# EAGLE board Seeeduino_Mega_v1.23 (EAGLE 5.10)
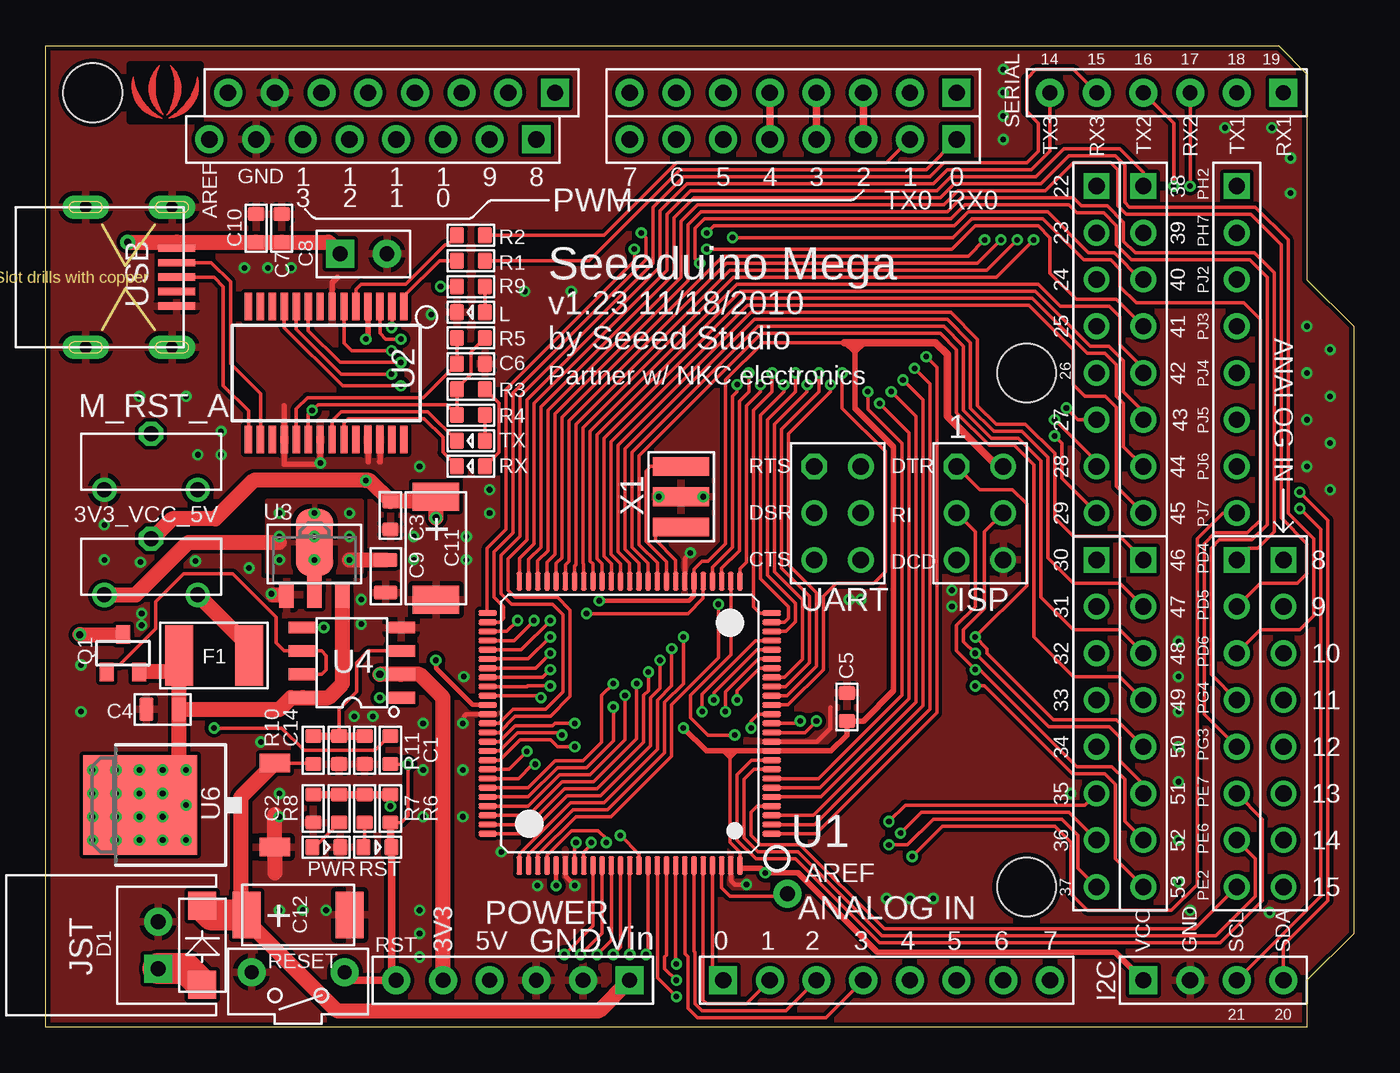
[diagram p0: board, top side]
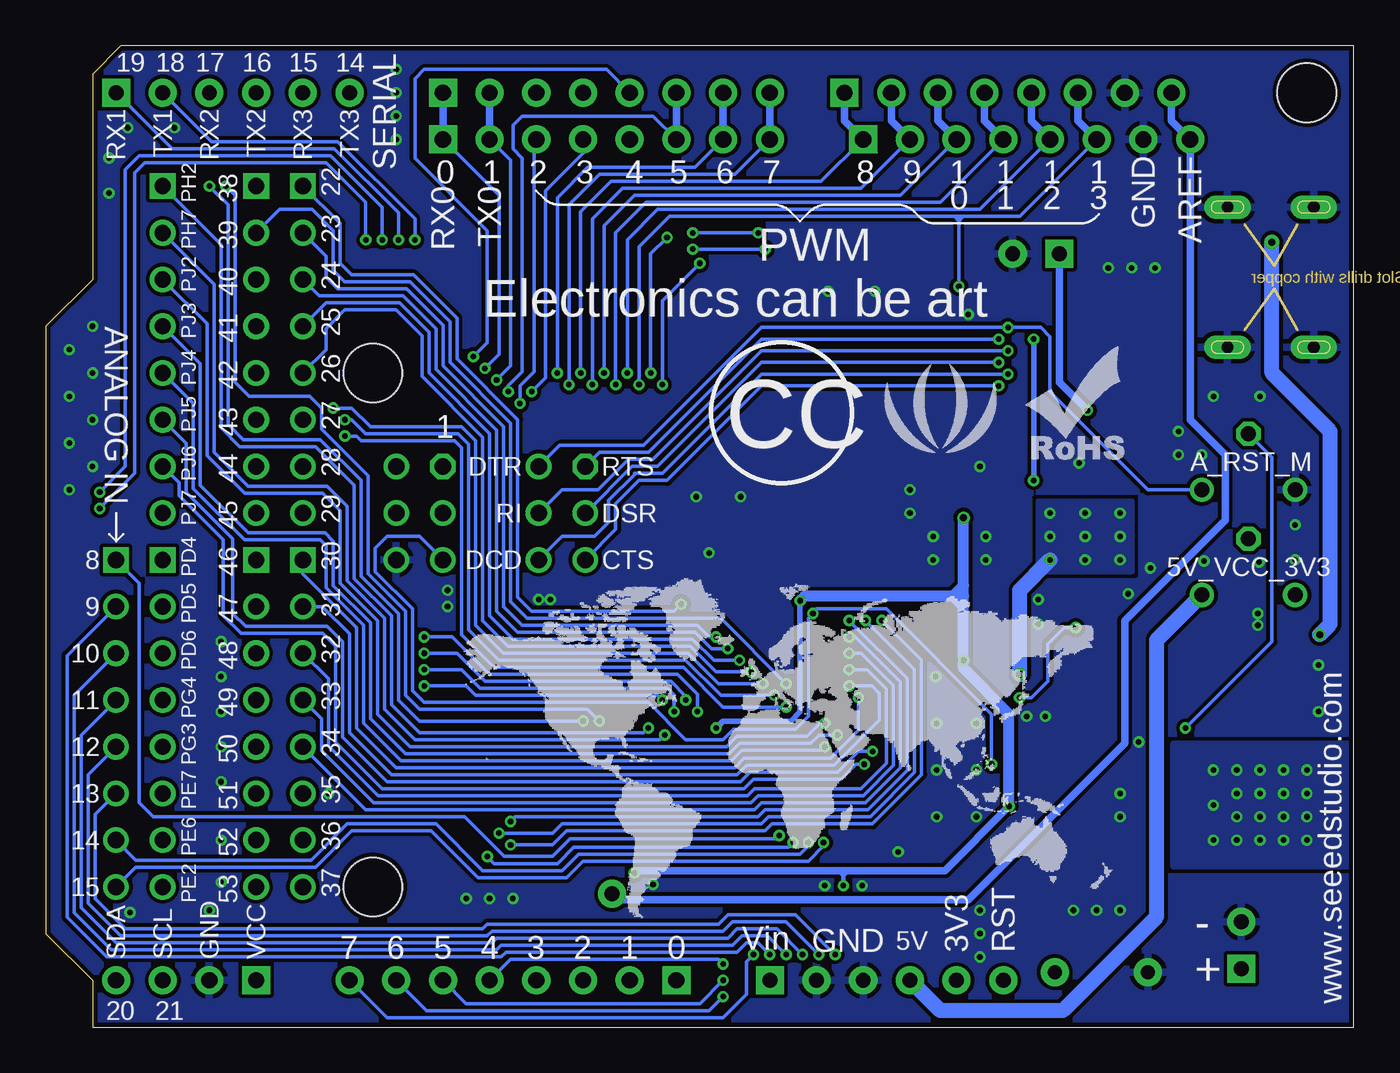
[diagram p1: board, bottom side, seen from below]

Size 71.12 x 53.34 mm. Coordinates in mm from the lower left corner, seen from the top.
Outline: 68.58,40.64 71.12,38.1 71.12,5.08 68.58,2.54 68.58,0 0,0 0,53.34 67.06,53.34 68.58,51.82 68.58,40.64
Copper layers (1*16): Top 0.035mm / dielectric 1.5mm / Bottom 0.035mm
Design rules "rule_manufacture *": minimum track width 8mil, minimum drill 12mil, track to track 6mil, track to pad 6mil, pad to pad 6mil, via to via 8mil, smd to smd 0mil, copper to edge 10mil, drill to drill 10mil, minimum pad ring 10mil, minimum via ring 6mil, stop-mask expansion 2mil, vias tented up to drill 25mil, thermal gap 10mil
Holes 3.2 mm at 2.54,50.8 53.34,7.62 53.34,35.56
tRestrict: area 22.5,30.6 to 23.4,32; area 4.6,49.3 to 8.4,52.3; area 17.5,31.5 to 18.2,32.3; area 15.2,38.9 to 15.9,39.9

## Footprints (pad centres in the part's own frame; a part is rotated, then mirrored left to right if it is on the bottom)
CK_1X8 = drill 0.889 pad 1.524 square: 1 0,8.89 | drill 0.889 pad 1.524 round: 2 0,6.35; 3 0,3.81; 4 0,1.27; 5 0,-1.27; 6 0,-3.81; 7 0,-6.35; 8 0,-8.89
2.54_JP_C = drill 0.813 round: A -1.27,2.54; B -1.27,-2.54 | drill 0.813 octagon: COM 1.778,0
0603_S = smd 0.762 x 0.889: 1 -0.762,0; 2 0.762,0
0805_S = smd 0.762 x 1.27: 1 -0.889,0; 2 0.889,0
PWR_1X2 = drill 0.813 pad 1.524 square: + 1.27,0 | drill 0.813 pad 1.524 round: - -1.27,0
TYPE_C = smd 1.524 x 2.54: + -2.794,0; - 2.794,0
DIODE_2010 = smd 1.524 x 1.524: + 0,-2.159; - 0,2.159
CK_1X8_THIN = drill 0.889 pad 1.397 square: 1 0,8.89 | drill 0.889 pad 1.397 round: 2 0,6.35; 3 0,3.81; 4 0,1.27; 5 0,-1.27; 6 0,-3.81; 7 0,-6.35; 8 0,-8.89
2512 = smd 1.524 x 3.302: 1 -1.905,0; 2 1.905,0
CK_1X4 = drill 0.889 pad 1.524 square: 1 0,3.81 | drill 0.889 pad 1.524 round: 2 0,1.27; 3 0,-1.27; 4 0,-3.81
CK_2X3_THIN = drill 0.889 pad 1.397 octagon: 1 -1.27,2.54 | drill 0.889 pad 1.397 round: 2 -1.27,0; 3 -1.27,-2.54; 4 1.27,-2.54; 5 1.27,0; 6 1.27,2.54
CK_1X6@1 = drill 0.813 pad 1.524 square: 1 0,6.35 | drill 0.813 pad 1.524 round: 2 0,3.81; 3 0,1.27; 4 0,-1.27; 5 0,-3.81; 6 0,-6.35
PWR_JST = drill 0.813 pad 1.524 square: + 0,-1.27 | drill 0.813 pad 1.524 round: - 0,1.27
LED0603_S = smd 0.762 x 0.889: 1 -0.762,0; 2 0.762,0
SOT23 = smd 0.762 x 1.016: 1 -0.889,-1.016; 2 0.889,-1.016; 3 0,1.016
BTN_5.0_RST = drill 0.762 pad 1.524 round: P$1 0,2.54; P$2 0,-2.54
TQFP100 = smd 1 x 0.3: 1 -7.725,6; 2 -7.725,5.5; 3 -7.725,5; 4 -7.725,4.5; 5 -7.725,4; 6 -7.725,3.5; 7 -7.725,3; 8 -7.725,2.5; 9 -7.725,2; 10 -7.725,1.5; 11 -7.725,1; 12 -7.725,0.5; 13 -7.725,0; 14 -7.725,-0.5; 15 -7.725,-1; 16 -7.725,-1.5; 17 -7.725,-2; 18 -7.725,-2.5; 19 -7.725,-3; 20 -7.725,-3.5; 21 -7.725,-4; 22 -7.725,-4.5; 23 -7.725,-5; 24 -7.725,-5.5; 25 -7.725,-6; 51 7.725,-6; 52 7.725,-5.5; 53 7.725,-5; 54 7.725,-4.5; 55 7.725,-4; 56 7.725,-3.5; 57 7.725,-3; 58 7.725,-2.5; 59 7.725,-2; 60 7.725,-1.5; 61 7.725,-1; 62 7.725,-0.5; 63 7.725,0; 64 7.725,0.5; 65 7.725,1; 66 7.725,1.5; 67 7.725,2; 68 7.725,2.5; 69 7.725,3; 70 7.725,3.5; 71 7.725,4; 72 7.725,4.5; 73 7.725,5; 74 7.725,5.5; 75 7.725,6 | smd 0.3 x 1: 26 -6,-7.725; 27 -5.5,-7.725; 28 -5,-7.725; 29 -4.5,-7.725; 30 -4,-7.725; 31 -3.5,-7.725; 32 -3,-7.725; 33 -2.5,-7.725; 34 -2,-7.725; 35 -1.5,-7.725; 36 -1,-7.725; 37 -0.5,-7.725; 38 0,-7.725; 39 0.5,-7.725; 40 1,-7.725; 41 1.5,-7.725; 42 2,-7.725; 43 2.5,-7.725; 44 3,-7.725; 45 3.5,-7.725; 46 4,-7.725; 47 4.5,-7.725; 48 5,-7.725; 49 5.5,-7.725; 50 6,-7.725; 76 6,7.725; 77 5.5,7.725; 78 5,7.725; 79 4.5,7.725; 80 4,7.725; 81 3.5,7.725; 82 3,7.725; 83 2.5,7.725; 84 2,7.725; 85 1.5,7.725; 86 1,7.725; 87 0.5,7.725; 88 0,7.725; 89 -0.5,7.725; 90 -1,7.725; 91 -1.5,7.725; 92 -2,7.725; 93 -2.5,7.725; 94 -3,7.725; 95 -3.5,7.725; 96 -4,7.725; 97 -4.5,7.725; 98 -5,7.725; 99 -5.5,7.725; 100 -6,7.725
SSOP28 = smd 0.4 x 1.5: 1 -4.225,-3.625; 2 -3.575,-3.625; 3 -2.925,-3.625; 4 -2.275,-3.625; 5 -1.625,-3.625; 6 -0.975,-3.625; 7 -0.325,-3.625; 8 0.325,-3.625; 9 0.975,-3.625; 10 1.625,-3.625; 11 2.275,-3.625; 12 2.925,-3.625; 13 3.575,-3.625; 14 4.225,-3.625; 15 4.225,3.625; 16 3.575,3.625; 17 2.925,3.625; 18 2.275,3.625; 19 1.625,3.625; 20 0.975,3.625; 21 0.325,3.625; 22 -0.325,3.625; 23 -0.975,3.625; 24 -1.625,3.625; 25 -2.275,3.625; 26 -2.925,3.625; 27 -3.575,3.625; 28 -4.225,3.625
SOT89 = smd 0.8 x 1.4: 1 -1.524,-1.905; 3 1.524,-1.905 | smd 0.8 x 1.9: 2 0,-1.651 | smd 2.032 x 3.65: 4 0,0.94
SOP08 = smd 0.635 x 1.524: 1 -1.905,-2.667; 2 -0.635,-2.667; 3 0.635,-2.667; 4 1.905,-2.667; 5 1.905,2.667; 6 0.635,2.667; 7 -0.635,2.667; 8 -1.905,2.667
TO252 = smd 1.016 x 1.651: 1 -2.286,-4.826; 2 2.286,-4.826 | smd 5.4 x 6.2: 3 0,2.5
MINI_STRONG = smd 2.032 x 0.406: 1 0.381,-1.575; 2 0.381,-0.787; 3 0.381,0; 4 0.381,0.787; 5 0.381,1.575 | drill 0.635 pad 1.27 long: GND@1 0.635,3.81; GND@2 5.334,3.81; GND@3 5.334,-3.81; GND@4 0.635,-3.81
XTAL_4X3 = smd 1.016 x 3.048: 1 -1.651,0; 2 0,0; 3 1.651,0

## Placement (x,y rotation side)
0~1  CK_1X8DD  [CK_1X8]  40.64,48.26 270 top
0~2  CK_1X8DD  [CK_1X8]  45.72,2.54 90 top
0~7  CK_1X8DD  [CK_1X8]  40.64,50.8 270 top
3V3_VCC_5V  2.54_JPC  [2.54_JP_C]  5.71,24.77 90 top
8~1  CK_1X8DD  [CK_1X8]  17.78,48.26 270 top
8~13  CK_1X8DD  [CK_1X8]  18.8,50.8 270 top
C1  100n  [0603_S]  18.73,15.05 90 top
C2  100n  [0603_S]  14.54,11.87 90 top
C3  100n  [0603_S]  18.73,27.81 90 top
C4  10u  [0805_S]  6.35,17.27 180 top
C5  100n  [0603_S]  43.56,17.4 270 top
C6  100n  [0603_S]  23.11,36.07 180 top
C7  100n  [0603_S]  12.83,43.43 90 top
C8  PWR2P_2.54_180  [PWR_1X2]  17.27,42.04 180 top
C9  10u  [0805_S]  18.48,24.51 270 top
C10  10n  [0603_S]  11.43,43.43 270 top
C11  47uF  [TYPE_C]  21.21,26.04 270 top
C12  47uF  [TYPE_C]  13.72,6.1 0 top
C14  100n  [0603_S]  15.94,15.05 90 top
D1  1N4001  [DIODE_2010]  8.51,4.45 0 top
D22~  CK_1X8_THIN  [CK_1X8_THIN]  57.15,36.83 0 top
D30~  CK_1X8_THIN  [CK_1X8_THIN]  57.15,16.51 0 top
D38~  CK_1X8_THIN  [CK_1X8_THIN]  59.69,36.83 0 top
D46~  CK_1X8_THIN  [CK_1X8_THIN]  59.69,16.51 0 top
F1  FUSE_500MA2512  [2512]  9.14,20.19 0 top
I2C  CK_1X4  [CK_1X4]  63.5,2.54 90 top
ISP  CK_2X3  [CK_2X3_THIN]  50.8,27.94 0 top
J8  CK_1X8_THIN  [CK_1X8_THIN]  64.77,16.51 0 top
J9  CK_1X8_THIN  [CK_1X8_THIN]  67.31,16.51 0 top
J10  CK_1X8_THIN  [CK_1X8_THIN]  64.77,36.83 0 top
J11  [CK_1X6@1]  25.4,2.54 270 top
JST  PWR2P_2.54  [PWR_JST]  6.1,4.45 0 top
L  GREEN  [LED0603_S]  23.11,38.86 180 top
LOGO1  LOGO_SILK  [LOGO_SILK]  22.48,32.89 0 bottom
LOGO2  ROHSSILK  [ROHS_SILK]  15.75,33.27 0 bottom
LOGO3  LOGO_COPPER150X124  [LOGO_COPPER_150X124]  6.48,50.55 0 top
M_RST_A  2.54_JPC  [2.54_JP_C]  5.71,30.48 90 top
PWR  GREEN  [LED0603_S]  15.24,9.78 0 top
Q1  P-MOSFET_SOT23  [SOT23]  4.19,20.32 0 top
R1  1k  [0603_S]  23.11,41.66 0 top
R2  1k  [0603_S]  23.11,43.05 0 top
R3  1k  [0603_S]  23.11,34.67 180 top
R4  1k  [0603_S]  23.11,33.27 180 top
R5  10k  [0603_S]  23.11,37.47 180 top
R6  10k  [0603_S]  18.73,11.87 90 top
R7  1k  [0603_S]  17.34,11.87 270 top
R8  1k  [0603_S]  15.94,11.87 270 top
R9  1k  [0603_S]  23.11,40.26 0 top
R10  10k  [0603_S]  14.54,15.05 270 top
R11  10k  [0603_S]  17.34,15.05 90 top
RESET  BOTTON_1_DP  [BTN_5.0_RST]  13.72,2.98 270 top
RST  RED  [LED0603_S]  18.03,9.78 0 top
RX  LED0603  [LED0603_S]  23.11,30.48 180 top
SERIAL  [CK_1X6@1]  60.96,50.8 270 top
TX  LED0603  [LED0603_S]  23.11,31.88 180 top
U1  ATMEGA1280-16AU  [TQFP100]  31.75,16.51 180 top
U2  FT232RL  [SSOP28]  15.24,35.56 180 top
U3  LD1117SOT89  [SOT89]  14.61,25.4 0 top
U4  LM358_SOP08  [SOP08]  16.64,19.81 90 top
U6  1117-5  [TO252]  7.62,12.06 90 top
U$1  WORLD_MAP_IID  [WORLD_MAP_1000X500]  20.95,15.62 0 bottom
UART  CK_2X3  [CK_2X3_THIN]  43.05,27.94 0 top
USB  [MINI_STRONG]  7.49,40.77 180 top
X1  16MHz  [XTAL_4X3]  34.54,28.83 90 top

## Library data of the parts
0~1 0~2 0~7 8~1 8~13 C8 D22~ D30~ D38~ D46~ I2C ISP J8-J11 JST SERIAL UART = CONNECTER
3V3_VCC_5V M_RST_A = CPT_CJ
C1-C7 C9-C12 C14 D1 F1 L PWR Q1 R1-R11 RESET RST RX TX X1 = CPT_SMD
LOGO1-LOGO3 U$1 = logo
U1-U4 U6 = ICs_v54
USB = Connector

## Nets
ADC8: J9.1 U1.89
ADC9: J9.2 U1.88
ADC10: J9.3 U1.87
ADC11: J9.4 U1.86
ADC12: J9.5 U1.85
ADC13: J9.6 U1.84
ADC14: J9.7 U1.83
ADC15: J9.8 U1.82
AP: U4.1 U4.5
AREF: 8~1.8 8~13.8 U1.98
CTS: U2.11 UART.3
D+: U2.15 USB.3
D-: U2.16 USB.2
DCD: U2.10 UART.4
DSR: U2.9 UART.2
DTR: M_RST_A.B U2.2 UART.6
FT_RST: C6.2 R5.2 U2.19
FT_RX: R2.1 U2.5
FT_TX: R1.1 U2.1
GATE: Q1.1 U4.6 U4.7
GND: 8~1.7 8~13.7 C2.1 C3.1 C4.2 C5.1 C6.1 C7.2 C8.- C9.2 C10.1 C11.- C12.- C14.1 I2C.2 ISP.4 J11.2 J11.3 JST.- L.2 M_RST_A.A PWR.2 R11.1 RESET.P$2 U1.11 U1.32 U1.62 U1.81 U1.99 U2.7 U2.18 U2.21 U2.25 U2.26 U3.1 U4.4 U6.1 USB.5 USB.GND@1 USB.GND@2 USB.GND@3 USB.GND@4 X1.2
LED_RX: RX.2 U2.23
LED_TX: TX.2 U2.22
N$1: C14.2 R10.1 R11.2 U4.3
N$2: U1.34 X1.3
N$3: U1.33 X1.1
N$4: D1.+ JST.+
N$5: R7.2 RST.1
N$6: U2.17
N$8: PWR.1 R8.2
N$9: L.1 R9.2
N$18: C1.2 M_RST_A.COM
N$31: R3.1 RX.1
N$32: R4.1 TX.1
PA0/D22: D22~.1 U1.78
PA1/D23: D22~.2 U1.77
PA2/D24: D22~.3 U1.76
PA3/D25: D22~.4 U1.75
PA4/D26: D22~.5 U1.74
PA5/D27: D22~.6 U1.73
PA6/D28: D22~.7 U1.72
PA7/D29: D22~.8 U1.71
PB0/D53: D46~.8 U1.19
PB1/SCK/D52: D46~.7 ISP.2 U1.20
PB2/MOSI/D51: D46~.6 ISP.5 U1.21
PB3/MISO/D50: D46~.5 ISP.1 U1.22
PB4/D10: 8~1.3 8~13.3 U1.23
PB5/D11: 8~1.4 8~13.4 U1.24
PB6/D12: 8~1.5 8~13.5 U1.25
PB7/D13: 8~1.6 8~13.6 R9.1 U1.26
PC0/D37: D30~.8 U1.53
PC1/D36: D30~.7 U1.54
PC2/D35: D30~.6 U1.55
PC3/D34: D30~.5 U1.56
PC4/D33: D30~.4 U1.57
PC5/D32: D30~.3 U1.58
PC6/D31: D30~.2 U1.59
PC7/D30: D30~.1 U1.60
PD0/SCL: I2C.3 U1.43
PD1/SDA: I2C.4 U1.44
PD2/RX1: SERIAL.1 U1.45
PD3/TX1: SERIAL.2 U1.46
PD4: J8.1 U1.47
PD5: J8.2 U1.48
PD6: J8.3 U1.49
PD7/D38: D38~.1 U1.50
PE0/RX0/D0: 0~1.1 0~7.1 R1.2 U1.2
PE1/TX0/D1: 0~1.2 0~7.2 R2.2 U1.3
PE2: J8.8 U1.4
PE3/D5: 0~1.6 0~7.6 U1.5
PE4/D2: 0~1.3 0~7.3 U1.6
PE5/D3: 0~1.4 0~7.4 U1.7
PE6: J8.7 U1.8
PE7: J8.6 U1.9
PF0/D54: 0~2.1 U1.97
PF1/D55: 0~2.2 U1.96
PF2/D56: 0~2.3 U1.95
PF3/D57: 0~2.4 U1.94
PF4/D58: 0~2.5 U1.93
PF5/D59: 0~2.6 U1.92
PF6/D60: 0~2.7 U1.91
PF7/D61: 0~2.8 U1.90
PG0/D41: D38~.4 U1.51
PG1/D40: D38~.3 U1.52
PG2/D39: D38~.2 U1.70
PG3: J8.5 U1.28
PG4: J8.4 U1.29
PG5/D4: 0~1.5 0~7.5 U1.1
PH0/RXD2: SERIAL.3 U1.12
PH1/TXD2: SERIAL.4 U1.13
PH2: J10.1 U1.14
PH3/D6: 0~1.7 0~7.7 U1.15
PH4/D7: 0~1.8 0~7.8 U1.16
PH5/D8: 8~1.1 8~13.1 U1.17
PH6/D9: 8~1.2 8~13.2 U1.18
PH7: J10.2 U1.27
PJ0/RXD3: SERIAL.5 U1.63
PJ1/TXD3: SERIAL.6 U1.64
PJ2: J10.3 U1.65
PJ3: J10.4 U1.66
PJ4: J10.5 U1.67
PJ5: J10.6 U1.68
PJ6: J10.7 U1.69
PJ7: J10.8 U1.79
PL0/D49: D46~.4 U1.35
PL1/D48: D46~.3 U1.36
PL2/D47: D46~.2 U1.37
PL3/D46: D46~.1 U1.38
PL4/D45: D38~.8 U1.39
PL5/D44: D38~.7 U1.40
PL6/D43: D38~.6 U1.41
PL7/D42: D38~.5 U1.42
RESET_1280: C1.1 ISP.3 J11.6 R6.1 RESET.P$1 RST.2 U1.30
RI: U2.6 UART.5
RTS: U2.3 UART.1
VCC: 3V3_VCC_5V.COM C2.2 C3.2 C5.2 C11.+ I2C.1 ISP.6 R6.2 R7.1 R8.1 U1.10 U1.31 U1.61 U1.80 U1.100 U2.4
VDD3V3: 3V3_VCC_5V.A C9.1 J11.5 U3.2 U3.4 U4.2
VDD5: C4.1 F1.1 Q1.2 U3.3 U4.8 U6.3
VDD5_USB: C7.1 C8.+ C10.2 Q1.3 R3.2 R4.2 R5.1 U2.20 USB.1
VDD5V: 3V3_VCC_5V.B F1.2 J11.4
VDD_EXT: C12.+ D1.- J11.1 R10.2 U6.2

## Tracks (layer width: path | path; a pad name or v marks a point on that pad's centre or on a via)
ADC8  (via drill 0.3)
  Top 0.203: U1.89 32.25,9.41 v31.24,10.41
  Bottom 0.203: J9.1 66.04,24.13 66.04,12.19 65.28,11.43 48.36,11.43 46.2,9.27 43.56,9.27 42.61,10.22 31.43,10.22 v31.24,10.41
ADC9  (via drill 0.3)
  Top 0.203: v31.75,3.94 U1.88
  Bottom 0.203: v31.75,3.94 32.38,4.57 33.02,4.57 33.53,4.06 46.1,4.06 46.35,3.81 67.82,3.81 69.98,5.97 69.98,20.19 J9.2
ADC10  (via drill 0.3)
  Top 0.203: U1.87 31.25,4.33 v30.86,3.94
  Bottom 0.203: v30.86,3.94 31.88,4.95 33.27,4.95 33.78,4.45 46.35,4.45 46.61,4.19 67.56,4.19 69.6,6.22 69.6,18.03 J9.3
ADC11  (via drill 0.3)
  Top 0.203: U1.86 30.75,4.71 v29.97,3.94
  Bottom 0.203: v29.97,3.94 31.37,5.33 33.53,5.33 34.04,4.83 46.61,4.83 46.86,4.57 67.31,4.57 69.22,6.48 69.22,15.88 J9.4
ADC12  (via drill 0.3)
  Top 0.203: U1.85 30.25,5.1 v29.08,3.94
  Bottom 0.203: v29.08,3.94 30.86,5.71 33.78,5.71 34.29,5.21 46.86,5.21 47.12,4.95 67.06,4.95 68.83,6.73 68.83,13.72 J9.5
ADC13  (via drill 0.3)
  Top 0.203: U1.84 29.75,5.49 v28.19,3.94
  Bottom 0.203: v28.19,3.94 30.35,6.1 34.04,6.1 34.54,5.59 47.12,5.59 47.37,5.33 66.8,5.33 68.45,6.99 68.45,11.56 J9.6
ADC14  (via drill 0.3)
  Top 0.203: U1.83 29.25,9.5 29.65,9.91 v29.65,10.03
  Bottom 0.203: v29.65,10.03 29.65,9.84 30.1,9.4 42.16,9.4 43.05,8.51 47.37,8.51 49.91,11.05 54.74,11.05 56.71,9.08 66.23,9.08 J9.7
ADC15  (via drill 0.3)
  Top 0.203: U1.82 28.75,9.95 v28.83,10.03
  Bottom 0.203: v28.83,10.03 28.83,9.84 29.65,9.02 41.91,9.02 42.8,8.13 47.62,8.13 50.16,10.67 54.48,10.67 56.45,8.7 66.23,8.7 J9.8
AP  (via drill 0.3)
  Top 0.203: v18.16,17.91 U4.1 | U4.5 v15.11,21.72
  Bottom 0.203: v18.16,17.91 17.53,17.91 16.64,18.8 16.64,20.83 15.75,21.72 v15.11,21.72
AREF  (via drill 0.81 pad 1.52)
  Top 0.203: U1.98 36.75,7.57 37.21,7.11 40.2,7.11 v40.32,7.24
  Bottom 0.203: 8.89,48.13 8.95,48.2 8~1.8
  Bottom 0.406: 8~1.8 9.91,49.28 8~13.8 | v40.32,7.24 40.01,6.92 20.95,6.92 12.45,15.43 12.45,22.1 6.99,27.56 6.99,31.11 8.89,33.02 8.89,48.13
CTS  (via drill 0.3)
  Top 0.203: U2.11 12.96,38.03 16.13,34.86 v19.3,34.86
  Bottom 0.203: v19.3,34.86 32.19,34.86 37.34,29.72 38.86,29.72 40.13,28.45 40.13,27.05 UART.3
D+
  Top 0.203: USB.3 9.14,40.77 9.65,40.26 9.65,34.86 11.02,33.5 U2.15
D-
  Top 0.203: USB.2 8.99,41.55 10.03,40.51 10.03,36.07 11.66,34.44 U2.16
DCD  (via drill 0.3)
  Top 0.203: U2.10 13.62,37.95 16.07,35.5 v18.8,35.5
  Bottom 0.203: v18.8,35.5 32.19,35.5 37.59,30.1 39.12,30.1 39.12,30.04 40.51,28.64 40.51,27.43 41.27,26.67 43.05,26.67 UART.4
DSR  (via drill 0.3)
  Top 0.203: U2.9 14.27,37.87 16,36.13 v19.3,36.13
  Bottom 0.203: v19.3,36.13 32.19,36.13 37.85,30.48 39.24,30.48 UART.2
DTR  (via drill 0.3)
  Top 0.203: U2.2 18.82,38.06 v18.8,38.04
  Bottom 0.203: UART.6 43.18,31.62 38.61,31.62 32.19,38.04 v18.8,38.04 17.02,38.04 16.51,37.53 16.51,34.54 11.18,29.21 M_RST_A.B
FT_RST
  Top 0.203: R5.2 C6.2 20.51,34.23 14.22,34.23 13.62,33.62 U2.19
FT_RX
  Top 0.203: U2.5 16.86,40.11 17.14,40.39 19.56,40.39 21.72,42.55 21.84,42.55 R2.1
FT_TX
  Top 0.203: U2.1 19.46,39.72 21.4,41.66 R1.1
GATE
  Top 0.203: U4.7 14.99,19.18 15.24,19.43 15.24,20.19 14.99,20.45 U4.6 12.95,20.45 12.51,20.89 12.51,22.29 10.16,24.64 7.49,24.64 5.97,23.11 5.97,21.65 4,19.68 3.56,19.68 3.3,19.43 Q1.1
GND  (via drill 0.3)
  Top 0.254: U1.11 41.93,15.51 42.67,16.26 42.67,17.4 | U1.32 34.75,25.48 v35.05,25.78 | U1.99 37.25,7.96 37.47,7.75 v38.1,7.75 | U1.81 28.25,8.2 v28.77,7.68 | U1.62 22.85,17.01 22.73,16.89
  Top 0.305: U2.25 17.52,30.75 17.53,30.73 | U2.26 18.16,30.74 18.16,30.73 | 12.96,33.77 U2.18 12.96,30.62 | 12.96,30.62 12.95,30.61 | U2.21 v14.91,30.66 14.86,30.61 12.98,30.61 12.96,30.62 | U2.7 15.56,40.46 15.88,40.77
  Top 0.813: 12.38,23.5 13.02,23.5 | 12.45,8.38 U6.1 12.45,11.56
  other vias: 66.55,6.22 49.28,23.75 49.28,22.86 24.77,9.53 66.67,48.9 64.14,48.9 61.59,20.95 61.59,19.05 61.59,17.14 61.59,15.24 61.59,13.34 61.59,10.16 67.69,47.24 67.69,45.34 69.85,36.83 68.58,38.1 68.58,35.56 68.58,33.02 68.58,30.48 69.85,34.29 69.85,31.75 69.85,29.21 52.07,49.53 52.07,48.26 55.75,12.7 43.69,23.24 44.32,23.24 33.34,28.83 35.75,28.83 20.32,30.48 24.13,29.21 24.13,27.94 22.86,26.67 22.86,25.4 20,25.4 20,26.67 26.73,7.68 12.7,12.7 12.7,11.43 12.7,6.35 13.97,6.35 15.24,6.35 52.07,50.8 52.07,52.07 62.23,6.35 61.59,7.87 48.26,6.99 46.99,6.99 45.72,6.99 10.79,41.27 12.06,41.27 13.34,41.27 20.95,38.73 26.04,40.01 28.57,40.01 20.32,6.35 20.32,5.08 20.32,3.81 20.51,16.51 20.51,13.97 20.51,11.43 11.05,24.96 12.26,23.56 11.68,15.49 5.14,25.27 8.13,25.34 22.73,19.05 17.14,23.24 17.14,21.91 17.78,16.89 16.76,16.89 7.62,34.29 22.67,16.51 22.67,13.97 22.67,11.43 5.21,22.48 5.21,21.84 5.08,34.29 9.53,32.38 9.53,31.11 8.26,31.11 1.91,17.14 1.91,19.68 3.17,25.4 3.17,27.3
  pour Top: -6.35,52.07 -5.08,52.07 -5.08,50.8 -6.35,50.8
  pour Bottom (isolate 0.203, rank 6): 0,53.34 67.06,53.34 68.58,51.82 68.58,40.64 71.12,38.1 71.12,5.08 68.58,2.54 68.58,0 0,0
  pour Top (isolate 0.203, rank 6): 0,53.34 67.06,53.34 68.58,51.82 68.58,40.64 71.12,38.1 71.12,5.08 68.58,2.54 68.58,0 0,0
LED_RX
  Top 0.203: U2.23 16.21,32.85 16.45,33.08 20.57,33.08 21.59,32.07 21.59,31.24 RX.2
LED_TX
  Top 0.203: U2.22 15.56,32.96 16.07,33.47 20.77,33.47 TX.2
N$1
  Top 0.203: U4.3 17.53,20.45 16.89,19.81 16.89,18.22 15.94,17.27 C14.2
  Top 0.406: R10.1 C14.2 R11.2
N$2
  Top 0.203: U1.34 33.75,25.3 32.64,26.42 32.64,30.23 32.89,30.48 X1.3
N$3
  Top 0.203: U1.33 34.25,25.38 33.15,26.48 33.15,27.18 X1.1
N$4
  Top 0.813: D1.+ 8.32,2.48
  Top 1.676: JST.+ 7.62,3.17 8.32,2.48
N$5
  Top 0.203: R7.2 17.34,9.84 RST.1
N$8
  Top 0.203: R8.2 14.61,9.78 PWR.1
N$9
  Top 0.203: R9.2 L.1
N$18  (via drill 0.3)
  Top 0.203: v9.14,16.26 12.83,16.26 14.03,15.05 17.91,15.05 18.67,15.81 C1.2
  Bottom 0.203: v9.14,16.26 4.45,20.95 4.45,30.99 M_RST_A.COM
N$31
  Top 0.203: RX.1 24.64,31.24 24.64,33.91 R3.1
N$32
  Top 0.203: TX.1 R4.1
PA0/D22  (via drill 0.3)
  Top 0.203: U1.78 26.75,9.36 28.82,11.43 30.73,11.43 34.04,14.73 34.04,17.53 36.58,20.07 v36.58,22.99
  Bottom 0.203: v36.58,22.99 36.96,22.61 44.7,22.61 45.47,23.37 45.47,33.02 48.77,36.32 48.77,38.54 51.12,40.89 54.48,40.89 55.12,41.53 55.12,43.69 D22~.1
PA1/D23  (via drill 0.3)
  Top 0.203: U1.77 26.25,9.39 28.67,11.81 30.54,11.81 33.66,14.92 33.66,17.65 34.67,18.67 v34.67,21.21
  Bottom 0.203: v34.67,21.21 35.05,21.21 35.69,21.84 45.21,21.84 46.23,22.86 46.23,32.64 49.53,35.94 49.53,38.16 51.5,40.13 55.24,40.13 55.88,40.77 55.88,41.91 D22~.2
PA2/D24  (via drill 0.3)
  Top 0.203: U1.76 25.75,9.42 28.53,12.19 30.35,12.19 33.27,15.11 33.27,17.78 34.04,18.54 v34.04,20.57
  Bottom 0.203: v34.04,20.57 34.92,20.57 35.81,21.46 45.47,21.46 46.61,22.61 46.61,32.45 49.91,35.75 49.91,37.97 51.69,39.75 56.26,39.75 D22~.3
PA3/D25  (via drill 0.3)
  Top 0.203: U1.75 26.28,10.51 28.35,12.57 30.16,12.57 32.89,15.3 32.89,17.91 33.4,18.41 v33.4,19.94
  Bottom 0.203: v33.4,19.94 34.8,19.94 35.94,21.08 45.72,21.08 46.99,22.35 46.99,32.26 50.29,35.56 50.29,37.78 51.88,39.37 55.88,39.37 D22~.4
PA4/D26  (via drill 0.3)
  Top 0.203: U1.74 26.25,11.01 28.19,12.95 29.97,12.95 32.51,15.49 32.51,18.03 32.77,18.29 v32.77,19.3
  Bottom 0.203: v32.77,19.3 34.67,19.3 36.07,20.7 45.97,20.7 47.37,22.1 47.37,32.07 50.67,35.37 50.67,37.59 52.07,38.99 54.86,38.99 55.88,37.97 55.88,36.83 D22~.5
PA5/D27  (via drill 0.3)
  Top 0.203: U1.73 26.24,11.51 28.07,13.34 29.78,13.34 32.13,15.68 v32.13,18.67 | D22~.6 56.13,33.02 v55.5,33.66
  Bottom 0.203: v32.13,18.67 34.54,18.67 36.2,20.32 46.23,20.32 47.75,21.84 47.75,31.88 48.51,32.64 53.47,32.64 54.48,33.66 v55.5,33.66
PA6/D28  (via drill 0.3)
  Top 0.203: U1.72 26.23,12.01 27.94,13.72 29.59,13.72 31.5,15.62 v31.5,18.03 | v54.86,33.02 57.15,30.73 D22~.7
  Bottom 0.203: v31.5,18.03 34.42,18.03 36.32,19.94 46.48,19.94 48.13,21.59 48.13,31.69 48.7,32.26 53.72,32.26 54.48,33.02 v54.86,33.02
PA7/D29  (via drill 0.3)
  Top 0.203: U1.71 26.23,12.51 27.81,14.1 29.4,14.1 30.86,15.56 v30.86,17.4 | v54.86,32.13 55.24,31.75 55.24,29.84 D22~.8
  Bottom 0.203: v30.86,17.4 34.29,17.4 36.45,19.56 46.74,19.56 48.51,21.34 48.51,31.5 48.9,31.88 53.98,31.88 54.23,32.13 v54.86,32.13
PB0/D53  (via drill 0.3)
  Top 0.203: D46~.8 58.17,9.14 58.17,13.21 57.59,13.78 55.82,13.78 51.05,18.54 v50.55,18.54 | U1.19 38.81,19.51 37.59,18.29 v37.59,17.78
  Bottom 0.203: v37.59,17.78 37.85,18.03 47.75,18.03 48.26,18.54 v50.55,18.54
PB1/SCK/D52  (via drill 0.3)
  Top 0.203: D46~.7 58.67,11.18 58.67,13.46 57.98,14.16 56.07,14.16 50.8,19.43 v50.55,19.43 49.53,20.45 49.53,21.84 50.55,22.86 50.55,26.92 ISP.2 | U1.20 38.74,20.01 36.96,18.23 v36.96,17.14
  Bottom 0.203: v36.96,17.14 36.96,18.06 37.32,18.41 47.5,18.41 48.51,19.43 v50.55,19.43
PB2/MOSI/D51  (via drill 0.3)
  Top 0.203: 59.69,13.08 D46~.6 59.69,13.21 58.42,14.48 58.42,15.75 57.85,16.32 54.55,16.32 v50.55,20.32 49.91,20.95 49.91,21.59 51.05,22.73 51.05,26.92 ISP.5 | U1.21 38.67,20.51 36.32,18.16 v36.32,17.78
  Bottom 0.203: v36.32,17.78 36.32,17.98 37.13,18.8 47.24,18.8 48.77,20.32 v50.55,20.32
PB3/MISO/D50  (via drill 0.3)
  Top 0.203: D46~.5 58.23,16.7 54.8,16.7 51.18,20.32 51.18,20.57 v50.55,21.21 53.34,24 53.34,28.45 52.58,29.21 50.8,29.21 ISP.1 | U1.22 38.6,21.01 35.69,18.1 v35.69,17.14
  Bottom 0.203: v35.69,17.14 35.69,18.1 36.77,19.18 46.99,19.18 49.02,21.21 v50.55,21.21
PB4/D10  (via drill 0.3)
  Top 0.203: v40.77,35.56 40.77,34.54 39.24,33.02 39.24,24.57 40.77,23.05 40.77,22.04 40.24,21.51 U1.23
  Bottom 0.203: 8~1.3 24.64,45.21 39.12,45.21 40.77,43.56 v40.77,35.56
  Bottom 0.406: 8~13.3 22.61,49.28 8~1.3
PB5/D11  (via drill 0.3)
  Top 0.203: v40.13,34.92 40.13,34.54 38.86,33.27 38.86,24.38 40.39,22.86 40.39,22.23 40.17,22.01 U1.24
  Bottom 0.203: 8~1.4 22.48,44.83 38.48,44.83 40.13,43.18 v40.13,34.92
  Bottom 0.406: 8~13.4 20.07,49.28 8~1.4
PB6/D12  (via drill 0.3)
  Top 0.203: U1.25 38.83,22.51 38.48,22.86 38.48,33.53 39.5,34.54 v39.5,35.56
  Bottom 0.203: 8~1.5 20.32,44.45 37.85,44.45 39.5,42.8 v39.5,35.56
  Bottom 0.406: 8~13.5 17.53,49.28 8~1.5
PB7/D13  (via drill 0.3)
  Top 0.203: v38.86,34.92 38.86,34.54 38.1,33.78 38.1,25.27 37.75,24.92 U1.26 | R9.1 v21.46,40.26
  Bottom 0.203: 8~1.6 18.16,44.07 21.21,44.07 | v38.86,34.92 38.86,42.42 37.21,44.07 21.72,44.07 | v21.46,40.26 21.46,43.81 | 21.46,43.81 21.21,44.07 | 21.21,44.07 21.46,44.07 | 21.46,43.81 21.46,44.07 | 21.46,43.81 21.72,44.07 | 21.46,44.07 21.72,44.07
  Bottom 0.406: 8~13.6 14.99,49.28 8~1.6
PC0/D37  (via drill 0.3)
  Top 0.203: D30~.8 56.13,8.64 56.13,10.41 55.24,11.3 48.26,11.3 46.86,9.91 v45.85,9.91 | U1.53 25.07,21.51 v25.65,22.1
  Bottom 0.203: v45.85,9.91 43.56,9.91 42.8,10.67 32,10.67 31.62,11.05 26.16,11.05 23.5,13.72 23.5,19.94 v25.65,22.1
PC1/D36  (via drill 0.3)
  Top 0.203: D30~.7 55.63,11.68 47.62,11.68 v46.48,10.54 | U1.54 25.45,21.01 v26.54,22.1
  Bottom 0.203: v46.48,10.54 43.56,10.54 43.05,11.05 32.19,11.05 31.81,11.43 26.29,11.43 23.88,13.84 23.88,19.43 v26.54,22.1
PC2/D35  (via drill 0.3)
  Top 0.203: D30~.6 56.52,12.06 46.74,12.06 v45.85,11.18 | U1.55 25.84,20.51 v27.43,22.1
  Bottom 0.203: v45.85,11.18 45.59,11.43 32.38,11.43 32,11.81 26.42,11.81 24.26,13.97 24.26,18.92 v27.43,22.1
PC3/D34  (via drill 0.3)
  Top 0.203: U1.56 26.23,20.01 v27.43,21.21
  Bottom 0.203: D30~.5 53.72,11.81 32.58,11.81 32.19,12.19 26.54,12.19 24.64,14.1 24.64,18.73 27.11,21.21 v27.43,21.21
PC4/D33  (via drill 0.3)
  Top 0.203: U1.57 26.62,19.51 v27.43,20.32
  Bottom 0.203: D30~.4 56.13,16.76 56.13,15.03 53.29,12.19 32.77,12.19 32.38,12.57 26.67,12.57 25.02,14.22 25.02,18.56 25.97,19.51 25.99,19.51 26.8,20.32 v27.43,20.32
PC5/D32  (via drill 0.3)
  Top 0.203: U1.58 27.01,19.01 v27.43,19.43
  Bottom 0.203: D30~.3 55.75,18.92 55.75,15.27 53.06,12.57 32.96,12.57 32.58,12.95 26.8,12.95 25.4,14.35 25.4,18.35 26.48,19.43 v27.43,19.43
PC6/D31  (via drill 0.3)
  Top 0.203: U1.59 26.16,18.51 26.19,18.54 v27.43,18.54
  Bottom 0.203: D30~.2 56.09,22.86 54.61,21.38 54.61,16 52.32,13.72 33.53,13.72 33.02,14.22 28.26,14.22 25.78,16.7 25.78,18.13 26.19,18.54 v27.43,18.54
PC7/D30  (via drill 0.3)
  Top 0.203: U1.60 26.82,18.01 v26.92,17.91
  Bottom 0.203: D30~.1 57.15,24.64 54.23,21.72 54.23,16.26 52.07,14.1 33.66,14.1 33.15,14.61 28.45,14.61 26.92,16.13 v26.92,17.91
PD0/SCL  (via drill 0.3)
  Top 0.203: I2C.3 69.34,7.11 69.34,27.05 v68.2,28.19 | U1.43 29.25,25.17 29.21,25.21 29.21,32.58 37.4,40.77 51.69,40.77 v53.72,42.8
  Bottom 0.203: v68.2,28.19 66.29,30.1 66.29,46.45 65.75,46.99 55.88,46.99 53.72,44.83 v53.72,42.8
PD1/SDA  (via drill 0.3)
  Top 0.203: I2C.4 67.31,4.45 69.72,6.86 69.72,27.56 v68.2,29.08 | U1.44 28.75,25.07 28.83,25.15 28.83,32.77 37.21,41.15 51.18,41.15 v52.83,42.8
  Bottom 0.203: v68.2,29.08 66.8,30.48 66.8,46.61 66.04,47.37 55.63,47.37 52.83,44.58 v52.83,42.8
PD2/RX1  (via drill 0.3)
  Top 0.203: U1.45 28.25,25.14 28.45,25.34 28.45,32.96 37.02,41.53 50.67,41.53 v51.94,42.8
  Bottom 0.203: v51.94,42.8 51.94,44.26 55.44,47.75 64.26,47.75 SERIAL.1
PD3/TX1  (via drill 0.3)
  Top 0.203: U1.46 27.75,25.21 28.07,25.53 28.07,33.15 36.83,41.91 50.16,41.91 v51.05,42.8
  Bottom 0.203: v51.05,42.8 51.05,43.94 55.24,48.13 62.1,48.13 SERIAL.2
PD4
  Top 0.203: U1.47 27.25,25.28 27.69,25.72 27.69,33.34 34.92,40.58 34.92,43.62 35.62,44.32 49.02,44.32 49.78,45.09 55.88,45.09 56.33,44.64 57.72,44.64 58.61,43.75 58.61,42.74 59.24,42.1 65.72,42.1 66.8,41.02 66.8,26.92 65.91,26.04 65.41,26.04 J8.1
PD5
  Top 0.203: J8.2 66.04,24.13 68.07,24.13 68.58,24.64 68.58,26.29 67.18,27.69 67.18,42.55 65.53,44.2 58.75,44.2 58.29,44.65 58.29,46.61 57.91,46.99 55.88,46.99 54.36,45.47 49.59,45.47 48.83,44.7 35.43,44.7 34.54,43.81 34.54,40.77 27.3,33.53 27.3,25.91 26.75,25.35 U1.48
PD6
  Top 0.203: J8.3 66.04,21.59 68.2,21.59 68.96,22.35 68.96,26.54 67.56,27.94 67.56,42.8 65.79,44.58 58.93,44.58 58.67,44.83 58.67,46.86 58.17,47.37 55.63,47.37 54.1,45.85 49.4,45.85 48.64,45.09 35.24,45.09 34.16,44.01 34.16,40.96 26.92,33.72 26.92,26.1 26.25,25.42 U1.49
PD7/D38
  Top 0.203: D38~.1 59.69,46.48 58.42,47.75 55.37,47.75 53.85,46.23 49.21,46.23 48.45,45.47 35.05,45.47 33.78,44.2 33.78,41.15 26.54,33.91 26.54,26.29 25.75,25.5 U1.50
PE0/RX0/D0  (via drill 0.3)
  Top 0.203: U1.2 41.81,11.01 48.07,17.27 48.07,34.99 v47.24,35.81 | R1.2 29.53,41.66 34.48,46.61 47.88,46.61 0~1.1
  Bottom 0.203: 0~1.1 46.48,45.21 46.48,36.58 v47.24,35.81
  Bottom 0.406: 0~1.1 0~7.1
PE1/TX0/D1  (via drill 0.3)
  Top 0.203: U1.3 41.74,11.51 47.69,17.46 47.69,34.1 v46.61,35.18 | R2.2 30.35,43.05 34.29,46.99 45.72,46.99 0~1.2
  Bottom 0.203: 0~1.2 46.86,48.26 46.86,48.13 45.85,47.12 45.85,35.94 v46.61,35.18
  Bottom 0.406: 0~1.2 0~7.2
PE2
  Top 0.203: U1.4 38.68,12.01 38.35,11.68 38.35,10.41 38.86,9.91 41.02,9.91 45.59,5.33 62.48,5.33 J8.8
PE3/D5  (via drill 0.3)
  Top 0.203: U1.5 42.16,12.51 47.31,17.65 47.31,33.21 v45.97,34.54
  Bottom 0.203: 0~1.6 38.1,49.53 45.21,49.53 45.72,49.02 45.72,47.75 45.21,47.24 45.21,35.62 45.97,34.86 v45.97,34.54
  Bottom 0.406: 0~1.6 0~7.6
PE4/D2  (via drill 0.3)
  Top 0.203: U1.6 42.09,13.01 46.93,17.84 46.93,32.32 v45.34,33.91
  Top 0.406: 0~1.3 0~7.3
  Bottom 0.203: 0~1.3 44.58,48.13 44.58,35.62 45.34,34.86 v45.34,33.91
PE5/D3  (via drill 0.3)
  Top 0.203: U1.7 42.02,13.51 46.55,18.03 46.55,31.75 44.7,33.59 v44.7,34.54
  Top 0.406: 0~1.4 0~7.4
  Bottom 0.203: 0~1.4 41.91,47.5 43.94,45.47 43.94,35.31 v44.7,34.54
PE6
  Top 0.203: U1.8 38.52,14.01 37.97,13.46 37.97,10.29 38.73,9.53 40.89,9.53 45.47,4.95 63.63,4.95 65.79,7.11 65.79,9.14 J8.7
PE7
  Top 0.203: U1.9 38.39,14.51 37.59,13.72 37.59,10.16 38.61,9.14 40.77,9.14 45.34,4.57 63.88,4.57 66.17,6.86 66.17,11.3 J8.6
PF0/D54
  Top 0.203: U1.97 36.25,3.12 0~2.1
PF1/D55
  Top 0.203: U1.96 35.75,1.46 35.94,1.27 38.1,1.27 0~2.2
PF2/D56
  Top 0.203: 0~2.3 40.26,0.89 35.69,0.89 35.31,1.27 35.31,4.06 35.25,4.12 U1.95
PF3/D57
  Top 0.203: 0~2.4 42.42,0.51 35.43,0.51 34.92,1.02 34.92,3.81 34.75,3.98 U1.94
PF4/D58  (via drill 0.3)
  Top 0.203: U1.93 34.25,3.47 v34.29,3.43
  Bottom 0.203: 0~2.5 45.85,3.68 34.54,3.68 v34.29,3.43
PF5/D59  (via drill 0.3)
  Top 0.203: U1.92 33.75,3.9 33.66,3.81 33.66,3.17 v34.29,2.54
  Bottom 0.203: 0~2.6 48.26,1.27 35.56,1.27 v34.29,2.54
PF6/D60  (via drill 0.3)
  Top 0.203: U1.91 33.25,2.69 v34.29,1.65
  Bottom 0.203: 0~2.7 50.42,0.89 35.05,0.89 v34.29,1.65
PF7/D61  (via drill 0.3)
  Top 0.203: U1.90 32.75,4.05 v32.64,3.94
  Bottom 0.203: 0~2.8 52.58,0.51 34.29,0.51 33.02,1.78 33.02,3.56 v32.64,3.94
PG0/D41  (via drill 0.3)
  Top 0.203: D38~.4 58.23,39.56 56.04,39.56 54.61,40.99 54.61,42.93 53.98,43.56 50.55,43.56 49.28,42.29 v35.94,42.29 | U1.51 24.02,22.58 24,22.61 24,26.04 25.02,27.05 25.02,34.67 32,41.66 v32,42.29
  Bottom 0.203: v32,42.29 v35.94,42.29
PG1/D40  (via drill 0.3)
  Top 0.203: D38~.3 59.56,40.64 58.1,42.1 56.71,42.1 54.48,44.32 50.16,44.32 49.4,43.56 36.32,43.56 v35.94,43.18 | U1.52 24.68,22.01 24.89,22.23 24.89,22.86 24.38,23.37 24.38,25.84 25.4,26.86 25.4,34.48 32.64,41.72 32.64,42.93 v32.38,43.18
  Bottom 0.203: v32.38,43.18 v35.94,43.18
PG2/D39  (via drill 0.3)
  Top 0.203: U1.70 26.22,13.01 27.69,14.48 29.21,14.48 30.23,15.49 30.23,18.03 v30.86,18.67
  Bottom 0.203: D38~.2 58.42,44.45 56.64,44.45 55.5,43.31 55.5,41.15 54.86,40.51 51.31,40.51 49.15,38.35 49.15,36.13 45.85,32.83 45.85,23.11 44.96,22.23 34.42,22.23 v30.86,18.67
PG3  (via drill 0.3)
  Top 0.203: J8.5 62.99,17.02 62.99,26.29 63.56,26.86 65.34,26.86 66.04,27.56 66.04,38.48 65.15,39.37 59.31,39.37 58.42,40.26 58.42,41.21 57.91,41.72 56.45,41.72 54.23,43.94 50.35,43.94 49.34,42.93 v37.34,42.93 | v38.23,35.56 38.23,34.54 37.72,34.04 37.72,25.91 36.75,24.94 U1.28
  Bottom 0.203: v38.23,35.56 38.23,42.04 v37.34,42.93
PG4  (via drill 0.3)
  Top 0.203: J8.4 63.37,19.18 63.37,26.04 63.82,26.48 65.6,26.48 66.42,27.3 66.42,40.77 65.47,41.72 59.04,41.72 58.23,42.53 58.23,43.56 57.53,44.26 56.07,44.26 55.63,44.7 49.97,44.7 49.21,43.94 35.81,43.94 35.31,43.43 35.31,41.78 v35.56,41.53 | v37.59,34.92 37.59,34.54 37.34,34.29 37.34,26.1 36.25,25.01 U1.29
  Bottom 0.203: v37.59,34.92 37.59,39.5 v35.56,41.53
PG5/D4  (via drill 0.3)
  Top 0.203: U1.1 41.88,10.51 48.45,17.08 48.45,35.88 v47.88,36.45
  Top 0.406: 0~7.5 0~1.5
  Bottom 0.203: 0~7.5 40.64,52.07 50.55,52.07 51.05,51.56 51.05,47.24 47.12,43.31 47.12,37.21 v47.88,36.45
PH0/RXD2  (via drill 0.3)
  Top 0.203: U1.12 41.28,16.01 v41.91,16.64 | v62.23,45.72 SERIAL.3
  Bottom 0.203: v41.91,16.64 50.8,16.64 51.94,17.78 51.94,22.48 53.98,24.51 53.98,29.72 56.2,31.94 60.39,31.94 61.21,32.77 61.21,44.7 v62.23,45.72
PH1/TXD2  (via drill 0.3)
  Top 0.203: U1.13 40.89,16.51 v41.02,16.64 | v61.34,45.72 61.34,49.15 SERIAL.4
  Bottom 0.203: v41.02,16.64 41.66,17.27 50.8,17.27 51.56,18.03 51.56,22.61 53.59,24.64 53.59,29.97 56.13,32.51 56.13,33.66 56.77,34.29 60.07,34.29 60.83,35.05 60.83,45.21 v61.34,45.72
PH2  (via drill 0.3)
  Top 0.203: U1.14 38.73,17.01 38.35,16.64 v38.35,16.26
  Bottom 0.203: v38.35,16.26 38.61,16 50.8,16 52.32,17.53 52.32,22.35 54.36,24.38 54.36,29.46 56.45,31.56 60.58,31.56 61.59,32.58 61.59,42.55 J10.1
PH3/D6  (via drill 0.3)
  Top 0.203: U1.15 40.37,17.51 42.29,19.43 42.29,23.43 42.99,24.13 45.02,24.13 45.66,24.77 45.66,31.3 43.31,33.66 v43.31,35.56
  Bottom 0.203: 0~1.7 35.81,46.74 41.66,46.74 43.31,45.09 v43.31,35.56
  Bottom 0.406: 0~1.7 0~7.7
PH4/D7  (via drill 0.3)
  Top 0.203: U1.16 40.3,18.01 41.91,19.62 41.91,23.62 40.39,25.15 40.39,32.26 42.67,34.54 v42.67,34.92
  Bottom 0.203: 0~1.8 33.66,46.35 41.02,46.35 42.67,44.7 v42.67,34.92
  Bottom 0.406: 0~1.8 0~7.8
PH5/D8  (via drill 0.3)
  Top 0.203: v42.04,35.56 42.04,34.54 40.01,32.51 40.01,24.96 41.53,23.43 41.53,19.81 40.23,18.51 U1.17
  Bottom 0.203: 8~1.1 28.96,45.97 40.39,45.97 42.04,44.32 v42.04,35.56
  Bottom 0.406: 8~13.1 27.69,49.28 8~1.1
PH6/D9  (via drill 0.3)
  Top 0.203: v41.4,34.92 41.4,34.54 39.62,32.77 39.62,24.77 41.15,23.24 41.15,20 40.16,19.01 U1.18
  Bottom 0.203: 8~1.2 26.8,45.59 39.75,45.59 41.4,43.94 v41.4,34.92
  Bottom 0.406: 8~13.2 25.15,49.28 8~1.2
PH7  (via drill 0.3)
  Top 0.203: U1.27 37.25,20.23 35.05,18.03 35.05,16.83 36.01,15.88 v37.47,15.88
  Bottom 0.203: v37.47,15.88 37.72,15.62 51.05,15.62 52.7,17.27 52.7,22.23 54.74,24.26 54.74,28.32 55.82,29.4 60.13,29.4 61.98,31.24 61.98,40.39 J10.2
PJ0/RXD3
  Top 0.203: U1.63 24.64,16.51 25.4,17.27 27.18,17.27 28.13,18.22 28.13,22.42 27.56,22.99 25.34,22.99 24.77,23.56 24.77,25.65 25.78,26.67 25.78,34.29 33.02,41.53 33.02,44.58 34.67,46.23 48.07,46.23 48.83,46.99 53.34,46.99 53.98,47.62 53.98,49.15 53.34,49.78 53.34,51.56 53.85,52.07 55.88,52.07 SERIAL.5
PJ1/TXD3
  Top 0.203: U1.64 24.65,16.01 25.53,16.89 27.43,16.89 28.51,17.97 28.51,22.67 27.81,23.37 25.53,23.37 25.15,23.75 25.15,25.46 26.16,26.48 26.16,34.1 33.4,41.34 33.4,44.39 34.86,45.85 48.26,45.85 49.02,46.61 53.59,46.61 54.61,47.62 SERIAL.6
PJ2  (via drill 0.3)
  Top 0.203: U1.65 24.65,15.51 25.53,16.38 27.56,16.38 27.69,16.51 v28.77,16.51
  Bottom 0.203: v28.77,16.51 29.02,16.51 29.72,15.81 33.53,15.81 34.1,15.24 51.31,15.24 53.09,17.02 53.09,22.1 55.12,24.13 55.12,28.07 56.07,29.02 60.33,29.02 62.36,31.05 62.36,38.23 J10.3
PJ3  (via drill 0.3)
  Top 0.203: U1.66 24.66,15.01 25.65,16 27.94,16 v28.07,15.88
  Bottom 0.203: v28.07,15.88 29.08,15.88 29.53,15.43 33.4,15.43 33.97,14.86 51.56,14.86 53.47,16.76 53.47,21.97 55.5,24 55.5,26.42 55.94,26.86 60.13,26.86 62.74,29.46 62.74,36.07 J10.4
PJ4  (via drill 0.3)
  Top 0.203: U1.67 24.67,14.51 25.78,15.62 27.43,15.62 27.81,15.24 v28.77,15.24
  Bottom 0.203: v28.77,15.24 28.96,15.05 33.27,15.05 33.85,14.48 51.82,14.48 53.85,16.51 53.85,21.84 55.88,23.88 55.88,26.16 56.2,26.48 60.33,26.48 63.12,29.27 63.12,33.91 J10.5
PJ5  (via drill 0.3)
  Top 0.203: v26.16,14.99 25.19,14.01 U1.68
  Bottom 0.203: v26.16,14.99 26.92,14.99 28.07,13.84 32.83,13.84 33.34,13.34 52.58,13.34 54.99,15.75 54.99,20.95 55.82,21.78 60.26,21.78 60.96,22.48 60.96,26.54 63.5,29.08 63.5,31.75 J10.6
PJ6  (via drill 0.3)
  Top 0.203: U1.69 25.7,13.51 26.48,14.29 v26.61,14.29
  Bottom 0.203: v26.61,14.29 27.05,14.29 27.88,13.46 32.64,13.46 33.15,12.95 52.83,12.95 55.37,15.49 55.37,20.7 56.07,21.4 60.52,21.4 61.47,22.35 61.47,26.48 63.88,28.89 63.88,29.59 J10.7
PJ7  (via drill 0.3)
  Top 0.203: U1.79 27.25,9.34 28.57,10.67 30.04,10.67 30.48,10.22 v30.48,10.03 | J10.8 64.01,27.94 62.61,26.54 62.61,7.75 61.21,6.35 56.64,6.35 55.75,7.24 55.75,10.03 54.86,10.92 48.77,10.92 v47.12,9.27
  Bottom 0.203: v47.12,9.27 46.74,8.89 43.31,8.89 42.42,9.78 30.73,9.78 v30.48,10.03
PL0/D49
  Top 0.203: D46~.4 58.42,19.05 55.88,19.05 53.72,21.21 53.72,30.58 52.68,31.62 51.31,31.62 49.53,33.4 49.53,36.83 48.64,37.72 38.92,37.72 32.26,31.05 32.26,26.23 33.25,25.23 U1.35
PL1/D48
  Top 0.203: D46~.3 58.42,21.59 55.88,21.59 54.1,23.37 54.1,30.78 52.88,32 51.44,32 49.91,33.53 49.91,37.02 48.83,38.1 38.73,38.1 31.88,31.24 31.88,26.1 32.75,25.23 U1.36
PL2/D47
  Top 0.203: D46~.2 58.42,24.13 55.88,24.13 54.48,25.53 54.48,30.98 53.08,32.38 51.56,32.38 50.29,33.66 50.29,37.21 49.02,38.48 38.54,38.48 31.5,31.43 31.5,25.97 32.25,25.22 U1.37
PL3/D46
  Top 0.203: D46~.1 58.42,26.67 55.88,26.67 54.86,27.69 54.86,31.18 53.28,32.77 51.69,32.77 50.67,33.78 50.67,37.4 49.21,38.86 38.35,38.86 31.11,31.62 31.11,25.84 31.75,25.21 U1.38
PL4/D45
  Top 0.203: D38~.8 58.23,29.4 58.23,33.69 57.63,34.29 56.52,34.29 55.88,34.92 55.88,36.83 53.47,39.24 38.16,39.24 30.73,31.81 30.73,25.72 31.25,25.2 U1.39
PL5/D44
  Top 0.203: D38~.7 58.61,31.56 58.61,33.91 58.23,34.29 58.23,36.01 57.59,36.64 56.63,36.64 53.65,39.62 37.97,39.62 30.35,32 30.35,25.59 30.75,25.19 U1.40
PL6/D43
  Top 0.203: D38~.6 59.69,33.47 58.61,34.54 58.61,36.23 57.82,37.02 56.81,37.02 53.82,40.01 37.78,40.01 29.97,32.19 29.97,25.46 30.25,25.19 U1.41
PL7/D42
  Top 0.203: D38~.5 59.69,35.81 58.42,37.08 58.42,38.61 57.85,39.18 55.18,39.18 53.98,40.39 37.59,40.39 29.59,32.38 29.59,25.34 29.75,25.18 U1.42
RESET_1280  (via drill 0.3)
  Top 0.203: U1.30 35.75,23.3 34.92,22.48 v29.4,22.48 | RST.2 18.73,9.84 | C1.1 v19.68,14.29 19.68,11.49 19.3,11.11 R6.1
  Top 0.406: RESET.P$1 16.7,2.54 J11.6 18.8,2.79 RST.2 | 18.73,9.84 R6.1
  Bottom 0.203: ISP.3 50.8,26.67 52.58,26.67 53.21,26.04 53.21,24.77 51.18,22.73 51.18,18.29 50.55,17.65 38.35,17.65 36.32,15.62 34.29,15.62 33.72,16.19 30.35,16.19 29.65,16.89 29.65,22.23 v29.4,22.48 29.4,22.54 29.21,22.73 25.4,22.73 19.68,17.02 v19.68,14.29
RI  (via drill 0.3)
  Top 0.203: U2.6 16.21,37.19 16.64,36.77 v18.8,36.77
  Bottom 0.203: v18.8,36.77 32.19,36.77 38.1,30.86 39.43,30.86 41.08,29.21 43.05,29.21 UART.5
RTS  (via drill 0.3)
  Top 0.203: U2.3 18.16,37.72 18.48,37.4 v19.3,37.4
  Bottom 0.203: v19.3,37.4 32.19,37.4 38.35,31.24 41.02,31.24 UART.1
VCC  (via drill 0.3, 0.38)
  Top 0.203: U1.31 35.25,24.9 35.69,25.34 36.01,25.34 36.96,26.29 36.96,35.18 38.99,37.21 43.43,37.21 | 37.21,14.61 37.21,10.03 37.75,9.49 U1.100 37.78,8.75 37.78,8.64 | 37.21,14.61 37.59,14.99 | 37.59,14.99 37.72,14.99 | 37.59,14.99 37.21,14.99 37.21,14.61 | 37.21,14.61 36.83,14.99 36.77,14.99 36.77,15.01 37.21,15.01
  Top 0.254: U1.31 35.25,23.44 34.99,23.18 v30.1,23.18 | U1.61 23.19,17.51 21.21,19.49 v21.21,19.94 | v27.75,7.68 U1.80 | v27.75,7.68
  Top 0.305: I2C.1 58.17,4.06 45.21,4.06 40.89,8.38 v39.12,8.38 38.86,8.64 37.78,8.64 37.75,8.61 | v34.67,16.26 35.92,15.01 37.21,15.01 U1.10 42.7,15.01 43.56,15.88 C5.2 44.45,16.64 46.1,18.29 46.1,31.56 44.01,33.66 44.01,36.7 | 44.01,36.7 44.51,37.21 | 44.51,37.21 44.58,37.21 | 44.51,37.21 44.01,37.21 44.01,36.7 | 44.01,36.7 43.5,37.21 43.43,37.21 | U2.4 17.52,37.52 v17.4,37.4
  Top 0.406: ISP.6 51.75,30.48 49.02,33.21 49.02,36.58 48.39,37.21 44.01,37.21 43.43,37.21 | v18.73,12 R6.2 R7.1 R8.1 C2.2
  Top 0.813: v21.21,27.69 21.21,28.7 | 21.21,28.7 C11.+ | 21.21,28.7 21.08,28.57 C3.2 17.59,29.72 v17.4,29.72 11.3,29.72 9.21,27.62 6.86,27.62 5.78,26.54 3V3_VCC_5V.COM
  Bottom 0.203: 27.75,8.51 27.43,8.51 27.75,8.19 | 27.75,8.51 27.75,8.19 | 27.75,8.51 28.07,8.51 27.75,8.19
  Bottom 0.254: 27.75,8.19 v27.75,7.68
  Bottom 0.305: v34.67,16.26 34.29,16.64 30.61,16.64 30.1,17.14 v30.1,23.18 | v17.4,29.72 v17.4,37.4
  Bottom 0.406: v39.12,8.38 38.99,8.51 27.75,8.51 22.23,8.51 v18.73,12
  Bottom 0.61: v30.1,23.18 29.84,23.43 21.78,23.43 | 21.21,24 v21.21,27.69 | 21.78,23.43 21.21,22.86 | 21.21,23.43 21.78,23.43 | 21.78,23.43 21.21,24 | 21.21,23.43 21.21,24 | 21.21,23.43 v21.21,19.94 21.21,19.49 18.73,17.02 v18.73,12
VDD3V3  (via drill 0.3, 0.38)
  Top 0.813: U3.2 v14.61,25.4 U3.4 | 3V3_VCC_5V.A 4.89,23.5 7.75,26.35 12.7,26.35 | v16.51,25.4 C9.1 | v18.16,19.18 U4.2 20.32,19.18 21.59,17.91 J11.5
  Bottom 0.813: v18.16,19.18 18.16,23.75 v16.51,25.4
  other vias: 14.61,26.67 12.7,26.67 12.7,25.4 16.51,26.67 12.7,27.94 14.61,27.94 16.51,27.94
  pour Top (isolate 0.406): 12.06,28.57 17.14,28.57 17.14,24.77 12.06,24.77
  pour Bottom: 12.06,28.57 17.14,28.57 17.14,24.77 12.06,24.77
VDD5  (via drill 0.3)
  Top 0.406: U6.3 5.08,12.06 v5.08,11.43
  Top 0.813: 7.24,19.43 F1.1 | Q1.2 7.11,19.3 7.24,19.43 | C4.1 7.24,19.43 | C4.1 12.7,17.27 13.34,17.91 U4.8 15.37,17.91 16.13,18.67 U3.3 | C4.1 7.24,14.35 v7.62,13.97
  other vias: 7.62,12.06 6.35,13.97 5.08,13.97 3.81,13.97 2.54,13.97 2.54,12.7 3.81,12.7 5.08,12.7 6.35,12.7 7.62,10.16 6.35,11.43 3.81,11.43 2.54,11.43 2.54,10.16 3.81,10.16 5.08,10.16 6.35,10.16
  pour Bottom: 9.78,15.37 0,15.37 0,8.76 9.78,8.76
VDD5_USB  (via drill 0.3, 0.38, 0.38 pad 0.81)
  Top 0.203: 7.11,42.67 USB.1 | R5.1 23.11,36.7 23.11,35.5 22.35,34.73 R3.2 R4.2 21.78,33.85 14.8,33.85 v14.48,33.53 14.27,33.31 U2.20
  Top 0.813: C8.+ 15.37,42.67 C7.1 C10.2 7.11,42.67 v4.45,42.67 | v1.84,21.34 Q1.3
  Bottom 0.406: C8.+ 16,35.05 v14.48,33.53
  Bottom 0.813: v1.84,21.34 1.27,21.91 1.27,32.38 4.45,35.56 v4.45,42.67
VDD5V
  Top 0.813: F1.2 11.05,20.7 3V3_VCC_5V.B
  Bottom 0.813: J11.4 22.48,0.89 15.81,0.89 10.7,6 10.7,21.05 3V3_VCC_5V.B
VDD_EXT
  Top 0.203: U6.2 14.48,14.35 R10.2
  Top 0.813: J11.1 30.1,0.89 15.81,0.89 10.92,5.78 C12.+ 10.67,6.1 | D1.- 8.64,6.48 | U6.2 10.6,12.51 10.6,6.1
  Top 1.676: 10.67,6.1 10.6,6.1 9.02,6.1 8.64,6.48

## Text on the board
tPlace: 14 | 15 | 16 | 17 | 18 | 19 | TX3 | RX3 | TX2 | RX2 | TX1 | RX1 | AREF | GND | 1 | 1 | 1 | 1 | 9 | 8 | 7 | 6 | 5 | 4 | 3 | 2 | 1 | 0 | 3 | 2 | 1 | 0 | 22 | 38 | PH2 | PWM | TX0 | RX0 | 23 | 39 | PH7 | Seeeduino Mega | 24 | 40 | PJ2 | v1.23 11/18/2010 | by Seeed Studio | 25 | 41 | PJ3 | ANALOG IN | Partner w/ NKC electronics | 26 | 42 | PJ4 | 1 | 27 | 43 | PJ5 | RTS | DTR | 28 | 44 | PJ6 | DSR | RI | 29 | 45 | PJ7 | CTS | DCD | 30 | 46 | PD4 | 8 | 31 | 47 | PD5 | 9 | 32 | 48 | PD6 | 10 | 33 | 49 | PG4 | 11 | 34 | 50 | 12 | PG3 | 35 | 51 | PE7 | 13 | 36 | 52 | 14 | PE6 | AREF | 37 | 53 | PE2 | 15 | POWER | ANALOG IN | RST | 3V3 | 5V | GND | Vin | 0 | 1 | 2 | 3 | 4 | 5 | 6 | 7 | VCC | GND | SCL | SDA | 21 | 20
bPlace: 14 | 15 | 16 | 17 | 18 | 19 | TX3 | RX3 | TX2 | RX2 | TX1 | RX1 | AREF | GND | SERIAL | 22 | PH2 | 1 | 1 | 1 | 1 | 9 | 8 | 7 | 6 | 5 | 4 | 3 | 2 | 1 | TX0 | 0 | RX0 | 38 | 3 | 2 | 1 | 0 | 23 | PH7 | PWM | 24 | 39 | PJ2 | 40 | Electronics can be art | 25 | PJ3 | ANALOG IN | 26 | 41 | PJ4 | 42 | 27 | PJ5 | 1 | 43 | PJ6 | CC | DTR | 28 | A_RST_M | RTS | 44 | 29 | PJ7 | RI | DSR | 45 | PD4 | DCD | 30 | 8 | 5V_VCC_3V3 | CTS | 46 | 31 | PD5 | 9 | 47 | PD6 | 32 | 10 | 33 | 48 | PG4 | 11 | 49 | PG3 | 34 | 12 | 35 | 50 | PE7 | 13 | 51 | 36 | PE6 | 14 | 37 | 52 | PE2 | 15 | 53 | - | RST | 3V3 | 5V | GND | Vin | 0 | 1 | 2 | 3 | 4 | 5 | 6 | 7 | VCC | GND | SCL | SDA | + | www.seeedstudio.com | 21 | 20
Reference: SUPER